# Altium PCB 主板-双BH(1).PcbDoc (part 8 of 13)
Units mm, origin at the board's own origin, x right, y up, seen from the top; angles counter-clockwise.
Board outline 97.69 x 103.45 mm, 2 copper layers (Top Layer, Bottom Layer); 78 components, 75 nets, 243 pads, 279 vias.
Unrouted connection lines stored in the file: 7.
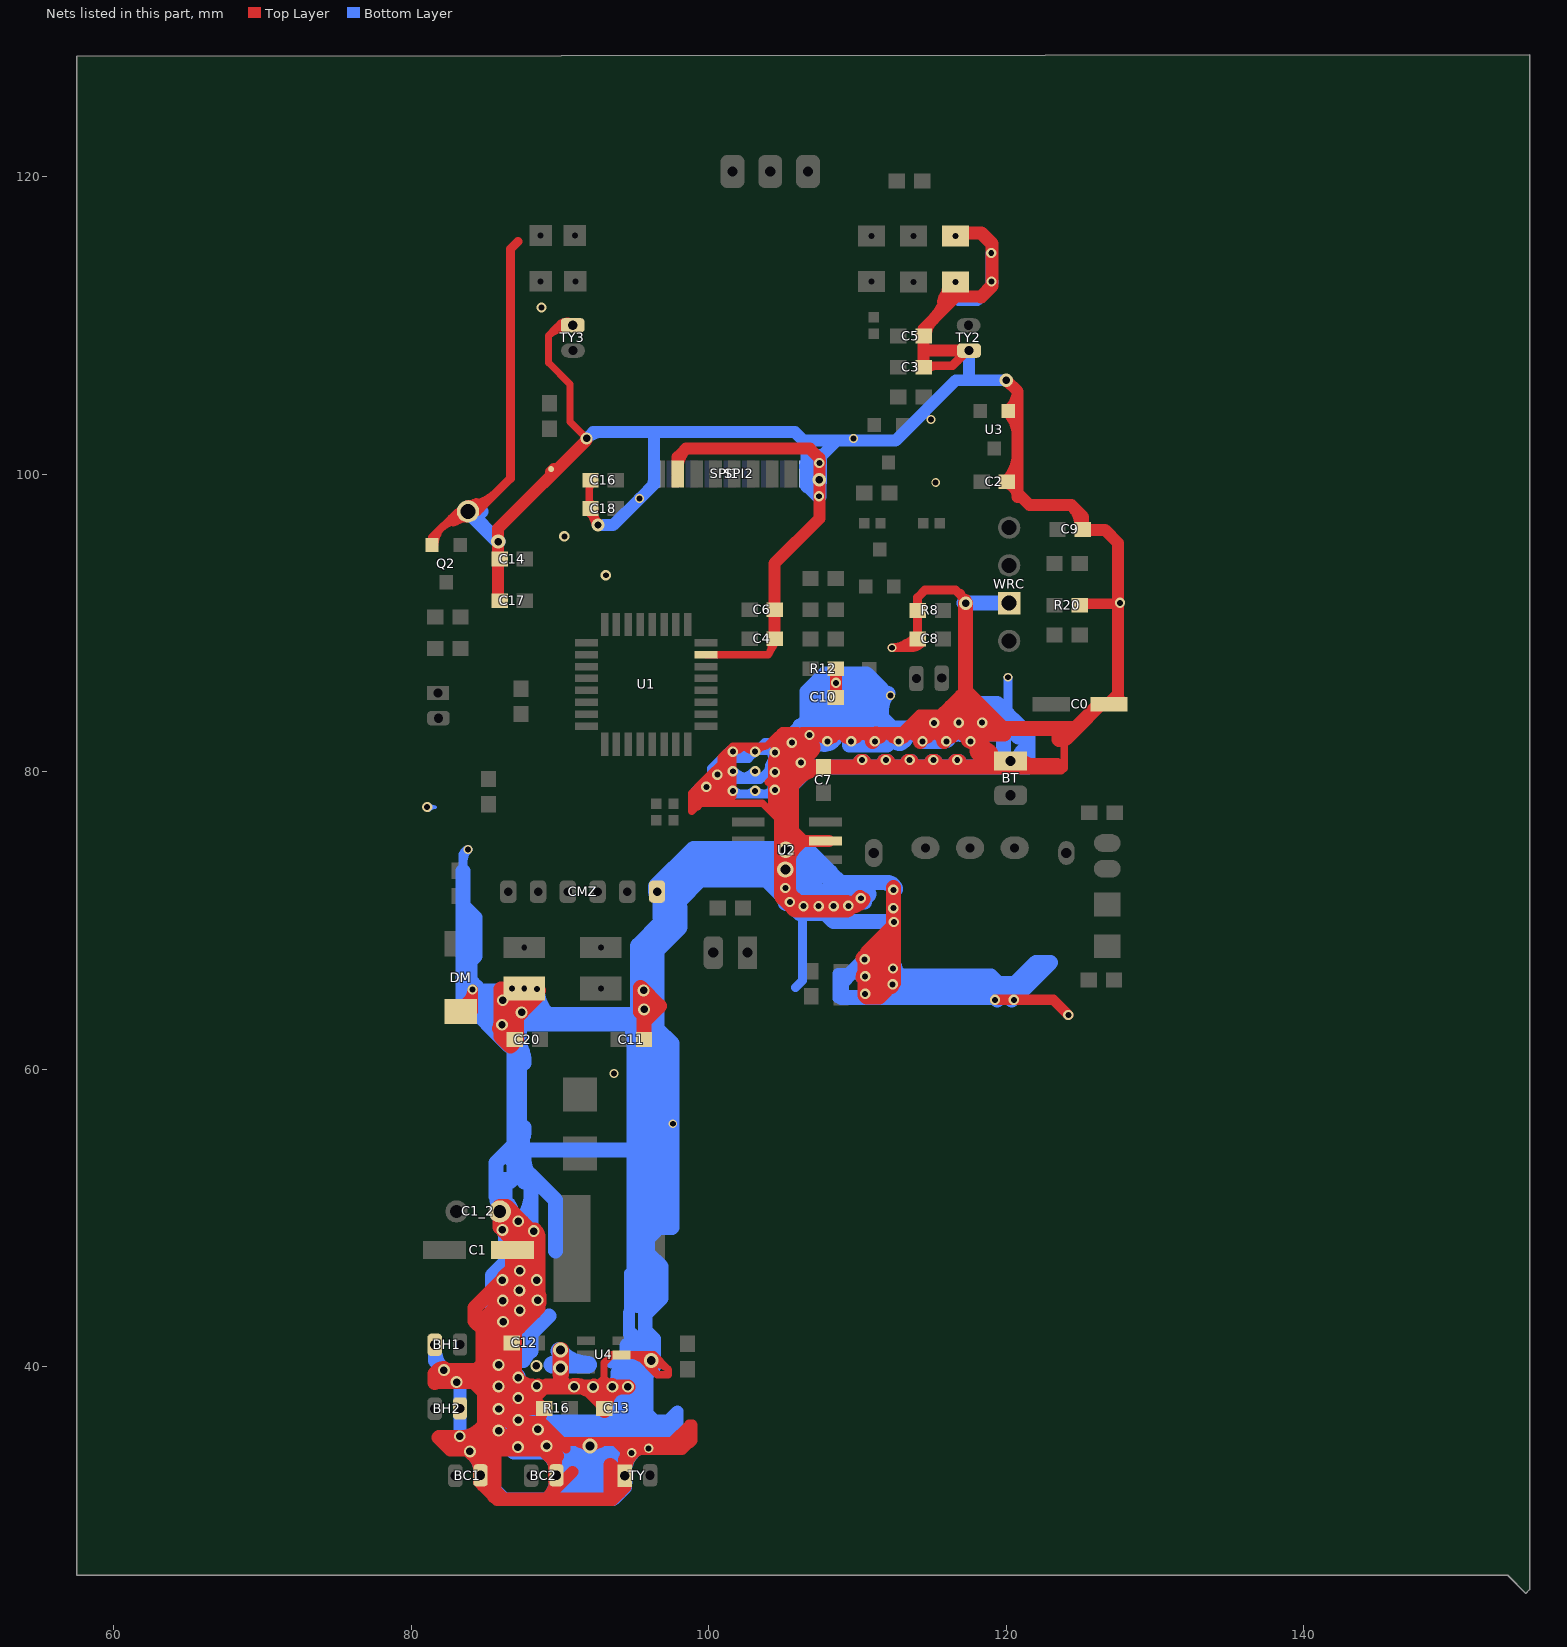
[diagram p8: the nets of this part, all layers, seen from the top]

## Via types
v1: diameter 0.7, hole 0.4, Top Layer to Bottom Layer, 108 vias
v2: diameter 0.68, hole 0.4, Top Layer to Bottom Layer, 87 vias
v3: diameter 0.8, hole 0.5, Top Layer to Bottom Layer, tented both sides, 33 vias
v4: diameter 0.6, hole 0.4, Top Layer to Bottom Layer, 12 vias
v5: diameter 0.9, hole 0.5, Top Layer to Bottom Layer, 8 vias
v6: diameter 0.8, hole 0.5, Top Layer to Bottom Layer, 6 vias
v7: diameter 1, hole 0.75, Top Layer to Bottom Layer, tented both sides, 5 vias
v8: diameter 3.4, hole 2.9, Top Layer to Bottom Layer, 4 vias
v9: diameter 1, hole 0.6, Top Layer to Bottom Layer, tented both sides, 3 vias
v10: diameter 1, hole 0.56, Top Layer to Bottom Layer, tented both sides, 2 vias
v11: diameter 1.1, hole 0.68, Top Layer to Bottom Layer, 2 vias
v12: diameter 0.8, hole 0.4, Top Layer to Bottom Layer, 2 vias
v13: diameter 0.65, hole 0.4, Top Layer to Bottom Layer, tented both sides, 2 vias
v14: diameter 1, hole 0.6, Top Layer to Bottom Layer, tented bottom, 1 vias
v15: diameter 0.7, hole 0.4, Top Layer to Bottom Layer, tented bottom, 1 vias
v16: diameter 0.95, hole 0.5, Top Layer to Bottom Layer, 1 vias
v17: diameter 0.64, hole 0.4, Top Layer to Bottom Layer, 1 vias
v18: diameter 0.62, hole 0.4, Top Layer to Bottom Layer, 1 vias

## Nets (pads, with @x,y where several pads share a name; then routed paths per layer and width w, separated by ;. In a path a pad name is that pad's centre, name@x,y a point inside that pad or via, vN(x,y) a via of type N, cw(c..) or ccw(c..) an arc to the next point about the centre after c; other vN are vias at no path point) (continued)
GND: (continued)
  Bottom Layer w0.6: 83.488,73.33 83.488,74.446 v4(83.82,74.778) ; 94.615,41.395 94.615,46.304 ; v1(99.847,78.994) v1@99.72,78.994 ; 105.842,65.507 106.319,65.984 106.319,70.485 106.319,70.912 v1(106.375,70.968) ; 108.864,64.745 108.61,64.745 108.61,66.446 108.687,66.523 109.626,66.523 109.957,66.523 ; 117.907,83.287 117.717,83.476 ; v4(120.117,86.36) 120.117,83.871 ; 120.244,83.312 120.117,83.439 120.117,83.871 ; 83.488,73.976 cw(c84.622,73.976) v4(83.82,74.778) ; 83.488,73.976 cw(c84.622,73.976) v4(83.82,74.778) ; 83.488,73.976 cw(c84.622,73.976) v4(83.82,74.778) ; 83.488,74.308 cw(c83.986,74.308) v4(83.82,74.778) ; 83.488,74.308 cw(c83.986,74.308) v4(83.82,74.778) ; 83.488,74.308 cw(c83.986,74.308) v4(83.82,74.778) ; 99.085,78.715 ccw(c99.085,79.711) v1@99.811,79.028 ; 99.085,78.715 cw(c99.678,78.122) v1@99.838,78.945 ; 99.085,78.715 ccw(c99.085,79.711) v1@99.811,79.028 ; 99.085,78.715 cw(c99.678,78.122) v1@99.838,78.945 ; 99.085,78.715 ccw(c99.085,79.711) v1@99.811,79.028 ; 99.085,78.715 cw(c99.678,78.122) v1@99.838,78.945 ; 99.085,78.715 99.365,78.994 ; 99.085,78.715 99.411,78.715 ; 99.365,78.994 v1@99.72,78.994 ; 99.365,78.994 100.18,79.809 ; 99.411,78.715 ccw(c99.411,79.119) v1@99.799,79.008 ; 99.411,78.715 ccw(c99.411,79.119) v1@99.799,79.008 ; 99.411,78.715 ccw(c99.411,79.119) v1@99.799,79.008 ; 99.411,78.715 99.614,78.511 100.203,78.511 ; v1@99.72,78.994 100.203,78.511 ; 99.805,79.434 cw(c100.584,78.655) v1@100.584,79.757 ; 99.805,79.434 cw(c100.584,78.655) v1@100.584,79.757 ; 99.805,79.434 cw(c100.584,78.655) v1@100.584,79.757 ; v1@99.883,79.029 ccw(c101.133,80.28) 101.133,78.511 ; v1@99.883,79.029 ccw(c101.133,80.28) 101.133,78.511 ; v1@99.883,79.029 ccw(c101.133,80.28) 101.133,78.511 ; v1@99.897,79 cw(c100.879,79.111) 100.18,79.809 ; v1@99.897,79 cw(c100.879,79.111) 100.18,79.809 ; v1@99.897,79 cw(c100.879,79.111) 100.18,79.809 ; 100.18,79.809 100.18,80.211 101.483,81.513 103.33,81.513 103.782,81.966 104.115,81.966 104.445,81.636 104.234,81.425 103.193,81.425 v1(103.124,81.356) 102.667,80.899 ; 100.203,78.511 105.232,78.511 ; v1@100.619,79.842 ccw(c101.52,80.742) 101.52,79.469 ; v1@100.619,79.842 ccw(c101.52,80.742) 101.52,79.469 ; v1@100.619,79.842 ccw(c101.52,80.742) 101.52,79.469 ; v1@100.634,79.807 cw(c101.559,79.807) 100.905,80.461 ; v1@100.634,79.807 cw(c102.705,79.807) 101.24,81.271 ; v1@100.634,79.807 cw(c101.559,79.807) 100.905,80.461 ; v1@100.634,79.807 cw(c102.705,79.807) 101.24,81.271 ; v1@100.634,79.807 cw(c101.559,79.807) 100.905,80.461 ; v1@100.634,79.807 cw(c102.705,79.807) 101.24,81.271 ; 100.922,79.469 ccw(c100.922,80.133) v1@101.58,80.045 ; 100.922,79.469 ccw(c100.922,80.133) v1@101.58,80.045 ; 100.922,79.469 ccw(c100.922,80.133) v1@101.58,80.045 ; 100.922,79.469 v1(100.584,79.807) 100.584,80.14 101.215,80.772 101.215,80.899 102.667,80.899 ; 100.922,79.469 103.447,79.469 103.835,79.858 ; 101.018,78.511 ccw(c101.018,79.326) v1@101.594,78.75 ; 101.018,78.511 ccw(c101.018,79.326) v1@101.594,78.75 ; 101.018,78.511 ccw(c101.018,79.326) v1@101.594,78.75 ; 101.026,81.056 cw(c101.629,80.453) v1@101.629,81.306 ; 101.026,81.056 cw(c101.629,80.453) v1@101.629,81.306 ; 101.026,81.056 cw(c101.629,80.453) v1@101.629,81.306 ; 101.215,80.64 cw(c101.95,80.64) v1@101.65,81.311 ; 101.215,80.64 cw(c101.95,80.64) v1@101.65,81.311 ; 101.215,80.64 cw(c101.95,80.64) v1@101.65,81.311 ; 101.215,80.74 cw(c101.807,80.74) v1@101.643,81.308 ; 101.215,80.74 cw(c101.807,80.74) v1@101.643,81.308 ; 101.215,80.74 cw(c101.807,80.74) v1@101.643,81.308 ; 101.63,79.469 ccw(c101.63,81.532) v1@103.089,80.074 ; 101.63,79.469 ccw(c101.63,81.532) v1@103.089,80.074 ; 101.63,79.469 ccw(c101.63,81.532) v1@103.089,80.074 ; v1@101.665,78.75 ccw(c102.24,79.326) 102.24,78.511 ; v1@101.665,78.75 ccw(c102.24,79.326) 102.24,78.511 ; v1@101.665,78.75 ccw(c102.24,79.326) 102.24,78.511 ; v1@101.665,80.074 ccw(c103.123,81.532) 103.123,79.469 ; v1@101.665,80.074 ccw(c103.123,81.532) 103.123,79.469 ; v1@101.665,80.074 ccw(c103.123,81.532) 103.123,79.469 ; v1@101.665,81.321 cw(c102.129,80.856) 102.129,81.513 ; v1@101.665,81.321 cw(c102.129,80.856) 102.129,81.513 ; v1@101.665,81.321 cw(c102.129,80.856) 102.129,81.513 ; v1@101.669,81.387 ccw(c102.667,82.164) 102.667,80.899 ; v1@101.669,81.387 ccw(c102.667,82.164) 102.667,80.899 ; v1@101.669,81.387 ccw(c102.667,82.164) 102.667,80.899 ; 101.9,80.899 ccw(c101.9,82.581) v1@103.089,81.392 ; 101.9,80.899 ccw(c101.9,82.581) v1@103.089,81.392 ; 101.9,80.899 ccw(c101.9,82.581) v1@103.089,81.392 ; 102.513,78.511 ccw(c102.513,79.326) v1@103.089,78.75 ; 102.513,78.511 ccw(c102.513,79.326) v1@103.089,78.75 ; 102.513,78.511 ccw(c102.513,79.326) v1@103.089,78.75 ; 102.624,81.513 cw(c102.624,80.856) v1@103.089,81.321 ; 102.624,81.513 cw(c102.624,80.856) v1@103.089,81.321 ; 102.624,81.513 cw(c102.624,80.856) v1@103.089,81.321 ; v1@103.159,78.75 ccw(c103.735,79.326) 103.735,78.511 ; v1@103.159,78.75 ccw(c103.735,79.326) 103.735,78.511 ; v1@103.159,78.75 ccw(c103.735,79.326) 103.735,78.511 ; 103.536,79.558 cw(c104.445,78.649) v1@104.445,79.935 ; 103.536,79.558 cw(c104.445,78.649) v1@104.445,79.935 ; 103.536,79.558 cw(c104.445,78.649) v1@104.445,79.935 ; 103.65,78.511 ccw(c103.65,79.586) v1@104.409,78.826 ; 103.65,78.511 ccw(c103.65,79.586) v1@104.409,78.826 ; 103.65,78.511 ccw(c103.65,79.586) v1@104.409,78.826 ; 103.835,79.858 cw(c104.183,79.51) v1@104.421,79.941 ; 103.835,79.858 cw(c104.183,79.51) v1@104.421,79.941 ; 103.835,79.858 cw(c104.183,79.51) v1@104.421,79.941 ; 104.036,81.425 cw(c104.036,80.896) v1@104.41,81.27 ; 104.036,81.425 cw(c104.036,80.896) v1@104.41,81.27 ; 104.036,81.425 cw(c104.036,80.896) v1@104.41,81.27 ; 104.127,81.954 cw(c103.478,81.305) v1@104.395,81.305 ; 104.127,81.954 cw(c103.478,81.305) v1@104.395,81.305 ; 104.127,81.954 cw(c103.478,81.305) v1@104.395,81.305 ; v1@104.48,78.826 ccw(c105.232,79.567) 105.232,78.511 ; v1@104.48,78.826 ccw(c105.232,79.567) 105.232,78.511 ; v1@104.48,78.826 ccw(c105.232,79.567) 105.232,78.511 ; 109.72,66.523 cw(c109.72,65.448) v1@110.48,66.208 ; 109.72,66.523 cw(c109.72,65.448) v1@110.48,66.208 ; 109.72,66.523 cw(c109.72,65.448) v1@110.48,66.208 ; 109.957,66.523 cw(c109.957,65.934) v1@110.472,66.219 ; 109.957,66.523 cw(c109.957,65.934) v1@110.472,66.219 ; 109.957,66.523 cw(c109.957,65.934) v1@110.472,66.219 ; 117.717,83.476 ccw(c118.129,83.888) v1@118.369,83.358 ; 117.717,83.476 ccw(c118.129,83.888) v1@118.369,83.358 ; 117.717,83.476 ccw(c118.129,83.888) v1@118.369,83.358 ; 117.717,83.476 117.717,84.162 118.008,83.871 120.117,83.871 ; v1@118.425,83.277 cw(c119.859,81.842) 119.859,83.871 ; v1@118.425,83.277 cw(c119.859,81.842) 119.859,83.871 ; v1@118.425,83.277 cw(c119.859,81.842) 119.859,83.871
  Bottom Layer w0.8: 83.488,68.916 83.541,68.863 ; 83.488,69.826 84.072,70.411 84.072,69.318 ; 84.009,65.724 83.541,66.192 83.541,68.863 ; 84.033,65.684 84.072,65.724 84.072,67.103 ; 84.072,67.384 84.072,68.331 ; v2(84.125,65.354) pad.0@87.621,65.354 ; 86.614,38.938 86.552,39 ; 86.614,63.833 86.711,63.833 ; 87.274,63.269 86.711,63.833 ; 87.6,62.944 90.38,62.944 cw(c90.38,65.29) 88.511,63.87 ; v3@87.617,63.817 87.602,63.833 86.711,63.833 ; pad.0@88.287,65.194 88.049,65.432 pad.0@87.6,65.432 ; pad.0@88.518,65.19 ccw(c88.901,64.899) 88.571,64.55 ; 88.889,64.143 cw(c88.521,63.774) 89.041,63.752 ; 89.484,63.5 89.84,63.144 ; v5(92.558,96.596) 93.574,96.596 v4(95.352,98.374) 96.33,99.353 pad.0@96.33,100.032 96.33,102.845 ; 94.64,42.164 94.64,43.637 ; v3@95.555,63.805 96.418,63.805 ; 95.656,66.345 95.656,66.712 ; 97.18,36.297 97.892,37.008 97.892,35.458 97.18,34.747 96.952,34.519 v13(95.961,34.519) 95.214,34.519 ; v5@107.417,99.593 v1@107.417,100.533 ; v1@107.442,101.092 108.623,102.273 106.375,102.273 ; v1@108.153,71.145 108.179,71.12 v1@108.382,70.917 ; 108.648,102.273 112.56,102.273 116.611,106.324 117.475,106.324 ; pad.0@116.6,112.932 116.6,111.924 116.815,111.709 118.059,111.709 118.999,112.649 v2(118.999,114.884) ; TY2.2@117.501,108.319 117.501,106.35 117.475,106.324 ; v5(120.015,106.324) 117.475,106.324 ; 83.541,68.863 84.072,68.331 ; 83.541,68.863 83.541,69.85 84.072,69.318 ; 84.072,68.331 84.072,69.318 ; v2@84.44,65.354 cw(c84.44,62.926) v3(86.157,64.643) ; v2@84.44,65.354 cw(c84.44,62.926) v3(86.157,64.643) ; v2@84.44,65.354 cw(c84.44,62.926) v3(86.157,64.643) ; 85.471,39 cw(c85.471,38.581) v3(85.877,38.684) ; 85.471,39 cw(c85.471,38.581) v3(85.877,38.684) ; 85.471,39 cw(c85.471,38.581) v3(85.877,38.684) ; 85.471,39 86.055,39 86.552,39 ; v3(85.877,38.684) cw(c86.552,38.121) 86.552,39 ; v3(85.877,38.684) cw(c86.552,38.121) 86.552,39 ; v3(85.877,38.684) cw(c86.552,38.121) 86.552,39 ; v3(86.157,64.643) cw(c87.621,63.491) pad.0@87.621,65.354 ; v3(86.157,64.643) cw(c87.621,63.491) pad.0@87.621,65.354 ; v3(86.157,64.643) cw(c87.621,63.491) pad.0@87.621,65.354 ; pad.0@86.537,64.937 ccw(c86.088,65.517) pad.0@86.816,65.424 ; pad.0@86.537,64.937 ccw(c86.088,65.517) pad.0@86.816,65.424 ; pad.0@86.537,64.937 ccw(c86.088,65.517) pad.0@86.816,65.424 ; pad.0@86.537,64.937 ccw(c86.088,65.517) pad.0@86.816,65.424 ; pad.0@86.537,64.937 ccw(c86.088,65.517) pad.0@86.816,65.424 ; pad.0@86.537,64.937 ccw(c86.088,65.517) pad.0@86.816,65.424 ; 86.55,39 ccw(c86.55,39.916) v3(87.198,39.268) ; 86.55,39 ccw(c86.55,39.916) v3(87.198,39.268) ; 86.55,39 ccw(c86.55,39.916) v3(87.198,39.268) ; 86.552,39 ccw(c86.552,39.912) v3(87.198,39.268) ; 86.552,39 ccw(c86.552,39.912) v3(87.198,39.268) ; 86.552,39 ccw(c86.552,39.912) v3(87.198,39.268) ; 86.711,63.833 ccw(c87.07,64.192) v3(87.427,63.83) ; 86.711,63.833 ccw(c87.07,64.192) v3(87.427,63.83) ; 86.711,63.833 ccw(c87.07,64.192) v3(87.427,63.83) ; pad.0@87.6,65.432 ccw(c88.075,65.907) pad.0@88.472,65.365 ; pad.0@87.6,65.432 ccw(c88.075,65.907) pad.0@88.472,65.365 ; pad.0@87.6,65.432 ccw(c88.075,65.907) pad.0@88.472,65.365 ; pad.0@87.6,65.432 89.227,63.805 ; pad.0@88.01,65.08 cw(c87.323,63.806) 88.721,64.18 ; pad.0@88.01,65.08 cw(c87.323,63.806) 88.721,64.18 ; pad.0@88.01,65.08 cw(c87.323,63.806) 88.721,64.18 ; pad.0@88.393,65.405 ccw(c90.242,65.405) 88.934,64.097 ; pad.0@88.393,65.405 ccw(c90.242,65.405) 88.934,64.097 ; pad.0@88.393,65.405 ccw(c90.242,65.405) 88.934,64.097 ; pad.0@88.6,65.415 ccw(c90.746,65.324) 89.227,63.805 ; pad.0@88.6,65.415 ccw(c90.746,65.324) 89.227,63.805 ; pad.0@88.6,65.415 ccw(c90.746,65.324) 89.227,63.805 ; 89.227,63.805 95.152,63.805 ; v6(91.796,102.413) cw(c92.838,101.37) 92.838,102.845 ; v6(91.796,102.413) cw(c92.838,101.37) 92.838,102.845 ; v6(91.796,102.413) cw(c92.838,101.37) 92.838,102.845 ; v6(91.796,102.413) 92.227,102.845 96.33,102.845 ; 94.488,34.519 cw(c94.488,34.091) v13@94.889,34.24 ; 94.488,34.519 cw(c94.488,34.091) v13@94.889,34.24 ; 94.488,34.519 cw(c94.488,34.091) v13@94.889,34.24 ; 94.488,34.519 94.818,34.519 95.214,34.519 ; v13@94.753,34.251 cw(c95.214,33.989) 95.214,34.519 ; v13@94.753,34.251 cw(c95.214,33.989) 95.214,34.519 ; v13@94.753,34.251 cw(c95.214,33.989) 95.214,34.519 ; v13@94.753,34.251 cw(c95.214,33.989) 95.214,34.519 ; v13@94.753,34.251 cw(c95.214,33.989) 95.214,34.519 ; v13@94.753,34.251 cw(c95.214,33.989) 95.214,34.519 ; v13@94.765,34.267 cw(c95.373,33.659) 95.373,34.519 ; v13@94.765,34.267 cw(c95.373,33.659) 95.373,34.519 ; v13@94.765,34.267 cw(c95.373,33.659) 95.373,34.519 ; 95.105,63.805 ccw(c95.105,64.585) v3(95.656,64.033) ; 95.105,63.805 ccw(c95.105,64.585) v3(95.656,64.033) ; 95.105,63.805 ccw(c95.105,64.585) v3(95.656,64.033) ; 95.152,63.805 ccw(c95.152,64.476) v3(95.656,64.033) ; 95.152,63.805 ccw(c95.152,64.476) v3(95.656,64.033) ; 95.152,63.805 ccw(c95.152,64.476) v3(95.656,64.033) ; v3(95.656,64.033) ccw(c96.208,64.585) 96.208,63.805 ; v3(95.656,64.033) ccw(c96.208,64.585) 96.208,63.805 ; v3(95.656,64.033) ccw(c96.208,64.585) 96.208,63.805 ; pad.0@96.143,99.166 ccw(c95.752,99.557) pad.0@96.305,99.557 ; pad.0@96.143,99.166 ccw(c95.752,99.557) pad.0@96.305,99.557 ; pad.0@96.143,99.166 ccw(c95.752,99.557) pad.0@96.305,99.557 ; 96.33,102.845 105.804,102.845 106.375,102.273 ; 106.375,102.273 106.832,101.816 106.832,101.321 ; SPI2.8@106.472,100.524 ccw(c105.603,101.394) 106.832,101.394 ; SPI2.8@106.472,100.524 ccw(c105.603,101.394) 106.832,101.394 ; SPI2.8@106.472,100.524 ccw(c105.603,101.394) 106.832,101.394 ; SPI2.8@106.473,100.526 ccw(c105.772,101.321) 106.832,101.321 ; SPI2.8@106.473,100.526 ccw(c105.772,101.321) 106.832,101.321 ; SPI2.8@106.473,100.526 ccw(c105.772,101.321) 106.832,101.321 ; SPI2.8@106.515,100.504 cw(c107.442,100.386) 107.442,101.321 ; SPI2.8@106.515,100.504 cw(c107.442,100.386) 107.442,101.321 ; SPI2.8@106.515,100.504 cw(c107.442,100.386) 107.442,101.321 ; 106.832,101.321 cw(c106.832,100.651) v1@107.491,100.771 ; 106.832,101.321 cw(c106.832,100.651) v1@107.491,100.771 ; 106.832,101.321 cw(c106.832,100.651) v1@107.491,100.771 ; 106.832,101.321 107.442,101.321 ; v1@107.392,100.762 cw(c108.068,100.762) 107.59,101.24 ; v1@107.392,100.762 cw(c108.068,100.762) 107.59,101.24 ; v1@107.392,100.762 cw(c108.068,100.762) 107.59,101.24 ; pad.0@116.388,112.72 cw(c115.876,112.208) 116.6,112.208 ; pad.0@116.388,112.72 cw(c115.876,112.208) 116.6,112.208 ; pad.0@116.388,112.72 cw(c115.876,112.208) 116.6,112.208 ; 116.6,112.208 cw(c117.324,112.208) pad.0@116.812,112.72 ; 116.6,112.208 cw(c117.324,112.208) pad.0@116.812,112.72 ; 116.6,112.208 cw(c117.324,112.208) pad.0@116.812,112.72 ; 118.929,112.579 ccw(c118.555,112.954) v2@119.084,112.954 ; 118.929,112.579 ccw(c118.555,112.954) v2@119.084,112.954 ; 118.929,112.579 ccw(c118.555,112.954) v2@119.084,112.954
  Bottom Layer w0.9: BH1.2@81.584,41.474 81.584,40.387 83.284,38.687 BH2.1@83.284,37.2 83.284,34.978 84.664,33.598 BC1.1@84.664,32.7 86.274,31.09 89.103,31.09 ; 87.046,39.656 87.046,36.779 86.652,36.386 ; BC2.1@90.145,32.131 89.764,31.75 89.103,31.09 ; 93.484,40.322 93.841,40.322 ; 93.869,32.055 93.721,31.907 93.659,31.845 93.505,31.691 92.954,31.14 92.903,31.09 89.103,31.09 ; 94.092,36.108 94.714,35.486 96.314,35.486 96.441,35.486 97.18,34.747 95.442,34.747 ; TY.2@94.401,31.993 94.401,33.731 ; 94.742,36.108 93.841,37.009 93.841,39.599 ; 95.112,35.077 95.239,34.95 ; 95.174,34.849 95.148,34.849 94.488,34.849 94.59,34.95 95.239,34.95 ; BH1.2@81.614,41.204 ccw(c83.66,41.204) v3@82.213,39.758 ; BH1.2@81.614,41.204 ccw(c83.66,41.204) v3@82.213,39.758 ; BH1.2@81.614,41.204 ccw(c83.66,41.204) v3@82.213,39.758 ; v3@83.093,38.999 cw(c82.633,38.539) 83.284,38.539 ; v3@83.093,38.999 cw(c82.633,38.539) 83.284,38.539 ; v3@83.093,38.999 cw(c82.633,38.539) 83.284,38.539 ; v3@83.211,35.331 ccw(c83.888,35.331) 83.409,34.853 ; v3@83.211,35.331 ccw(c83.888,35.331) 83.409,34.853 ; v3@83.211,35.331 ccw(c83.888,35.331) 83.409,34.853 ; v3@84.168,34.094 cw(c83.045,32.97) BC1.1@84.634,32.97 ; v3@84.168,34.094 cw(c83.045,32.97) BC1.1@84.634,32.97 ; v3@84.168,34.094 cw(c83.045,32.97) BC1.1@84.634,32.97 ; BC1.1@84.664,32.4 cw(c84.664,31.676) 85.176,32.188 ; BC1.1@84.664,32.4 cw(c84.664,31.676) 85.176,32.188 ; BC1.1@84.664,32.4 cw(c84.664,31.676) 85.176,32.188 ; 86.652,36.386 cw(c86.991,36.047) v3@87.222,36.466 ; 86.652,36.386 cw(c86.991,36.047) v3@87.222,36.466 ; 86.652,36.386 cw(c86.991,36.047) v3@87.222,36.466 ; 89.232,31.219 ccw(c88.021,32.43) BC2.1@89.734,32.43 ; 89.232,31.219 ccw(c88.021,32.43) BC2.1@89.734,32.43 ; 89.232,31.219 ccw(c88.021,32.43) BC2.1@89.734,32.43 ; v6@93.558,38.623 ccw(c92.875,39.307) 93.841,39.307 ; v6@93.558,38.623 ccw(c92.875,39.307) 93.841,39.307 ; v6@93.558,38.623 ccw(c92.875,39.307) 93.841,39.307 ; v6@93.558,38.694 cw(c92.875,38.011) 93.841,38.011 ; v6@93.558,38.694 cw(c92.875,38.011) 93.841,38.011 ; v6@93.558,38.694 cw(c92.875,38.011) 93.841,38.011 ; 93.841,37.034 cw(c96.189,37.034) v6@94.529,38.694 ; 93.841,37.034 cw(c96.189,37.034) v6@94.529,38.694 ; 93.841,37.034 cw(c96.189,37.034) v6@94.529,38.694 ; 93.841,39.599 ccw(c94.884,39.599) v6@94.548,38.611 ; 93.841,39.599 ccw(c94.884,39.599) v6@94.548,38.611 ; 93.841,39.599 ccw(c94.884,39.599) v6@94.548,38.611 ; TY.2@94.388,32.962 cw(c94.886,33.322) 94.452,33.757 ; TY.2@94.388,32.962 cw(c94.886,33.322) 94.452,33.757 ; TY.2@94.388,32.962 cw(c94.886,33.322) 94.452,33.757 ; TY.2@94.394,32.944 cw(c96.216,32.944) v13@94.928,34.233 ; TY.2@94.394,32.944 cw(c96.216,32.944) v13@94.928,34.233 ; TY.2@94.394,32.944 cw(c96.216,32.944) v13@94.928,34.233 ; 94.401,33.508 cw(c95.524,33.508) v13@94.73,34.302 ; 94.401,33.508 cw(c95.524,33.508) v13@94.73,34.302 ; 94.401,33.508 cw(c95.524,33.508) v13@94.73,34.302 ; 94.401,33.576 cw(c95.368,33.576) v13@94.737,34.308 ; 94.401,33.576 cw(c95.368,33.576) v13@94.737,34.308 ; 94.401,33.576 cw(c95.368,33.576) v13@94.737,34.308 ; 94.452,33.757 95.214,34.519 ; v13@94.898,34.203 cw(c95.961,33.14) v13@95.961,34.644 ; v13@94.898,34.203 cw(c95.961,33.14) v13@95.961,34.644 ; v13@94.898,34.203 cw(c95.961,33.14) v13@95.961,34.644 ; 95.214,34.519 cw(c95.689,34.043) v13@96.023,34.627 ; 95.214,34.519 cw(c95.689,34.043) v13@96.023,34.627 ; 95.214,34.519 cw(c95.689,34.043) v13@96.023,34.627 ; 95.214,34.519 cw(c95.689,34.043) v13@96.023,34.627 ; 95.214,34.519 cw(c95.689,34.043) v13@96.023,34.627 ; 95.214,34.519 cw(c95.689,34.043) v13@96.023,34.627 ; 95.214,34.519 95.442,34.747 ; 95.239,34.95 95.244,34.945 95.442,34.747 ; 95.711,34.747 cw(c95.711,34.268) v13@96.05,34.607 ; 95.711,34.747 cw(c95.711,34.268) v13@96.05,34.607 ; 95.711,34.747 cw(c95.711,34.268) v13@96.05,34.607 ; v13@95.873,34.607 cw(c96.211,34.268) 96.211,34.747 ; v13@95.873,34.607 cw(c96.211,34.268) 96.211,34.747 ; v13@95.873,34.607 cw(c96.211,34.268) 96.211,34.747